# EAGLE board nanopi-black2-shield (EAGLE 9.6.1)

Size 100 x 80 mm. Coordinates in mm from the lower left corner, seen from the top.
Outline: 0,0 100,0 100,80 0,80 0,0
Copper layers (1*16): Top 0.035mm / dielectric 1.5mm / Bottom 0.035mm
Design rules "default": minimum track width 6mil, minimum drill 0.35mm, track to track 6mil, track to pad 6mil, pad to pad 6mil, via to via 6mil, smd to smd 6mil, copper to edge 40mil, drill to drill 6mil, minimum pad ring 10mil, minimum via ring 8mil, stop-mask expansion 4mil, vias tented up to drill 0mil, thermal gap 10mil
Net classes: 1 Power: width 0.305 mm

## Footprints (pad centres in the part's own frame; a part is rotated, then mirrored left to right if it is on the bottom)
0603 = smd 1.1 x 1: 1 -0.85,0; 2 0.85,0
SOT223 = smd 1.219 x 2.235: 1 -2.311,-3.099; 2 0,-3.099; 3 2.311,-3.099 | smd 3.6 x 2.2: 4 0,3.099
61301021121 = drill 1.1: 1 -5.08,-1.27; 2 -5.08,1.27; 3 -2.54,-1.27; 4 -2.54,1.27; 5 0,-1.27; 6 0,1.27; 7 2.54,-1.27; 8 2.54,1.27; 9 5.08,-1.27; 10 5.08,1.27
61300621121 = drill 1.1: 1 -2.54,-1.27; 2 -2.54,1.27; 3 0,-1.27; 4 0,1.27; 5 2.54,-1.27; 6 2.54,1.27
61300611021 = drill 1.1: 1 6.35,2.77; 2 3.81,2.77; 3 1.27,2.77; 4 -1.27,2.77; 5 -3.81,2.77; 6 -6.35,2.77
61300411821 = drill 1.02: 1 -3.81,0; 2 -1.27,0; 3 1.27,0; 4 3.81,0
61300211821 = drill 1.02: 1 -1.27,0; 2 1.27,0

## Placement (x,y rotation side)
C1  1.0uF  [0603]  2.54,-10.16 0 top  (outside the outline)
C2  1.0uF  [0603]  2.54,-2.54 0 top
IC1  LM1117MP-3.3  [SOT223]  34.29,41.91 0 top
J1  [61301021121]  53.34,57.15 0 top
J2  [61300621121]  26.67,64.77 0 top
J4  [61300611021]  50.8,16.51 0 top
J5  [61300411821]  74.93,34.29 0 top
J6  [61300211821]  13.97,35.56 0 top

## Library data of the parts
C1 C2 = SparkFun-Capacitors; PROD_ID: CAP-00868
IC1 = lm1117; MF: Texas Instruments; MPN: LM1117MP-3.3; OC_FARNELL: 9778195; OC_NEWARK: 28X3416
J1 = 61300211821_Eagle_WR-PHD_rev19a; DATASHEET-URL: https://katalog.we-online.com/em/datasheet/61301021121.pdf; GENDER: Pin Header; IR: 3A; MATES: WR-PHD 2.54mm Angled DualSocket Header/Dual Socket Header/Dual Socket Header Bottom Entry/Dual Socket Header Bottom Entry Large/SMT Dual Socket Header/SMT Dual Socket Header Bottom Entry; PACKAGING: Bag; PART-NUMBER: 61301021121; PINS: 10; ROWS: Dual; TYPE: Board Stacker
J2 = 61300211821_Eagle_WR-PHD_rev19a; DATASHEET-URL: https://katalog.we-online.com/em/datasheet/61300621121.pdf; GENDER: Pin Header; IR: 3A; MATES: WR-PHD 2.54mm Angled DualSocket Header/Dual Socket Header/Dual Socket Header Bottom Entry/Dual Socket Header Bottom Entry Large/SMT Dual Socket Header/SMT Dual Socket Header Bottom Entry; PACKAGING: Bag; PART-NUMBER: 61300621121; PINS: 6; ROWS: Dual; TYPE: Board Stacker
J4 = 61300411121_Eagle_WR-PHD_rev19a; DATASHEET-URL: https://katalog.we-online.com/em/datasheet/61300611021.pdf; GENDER: Pin Header; IR: 3A; MATES: WR-PHD 2.5mm Angled Socket Header/SMT Socket Header/Socket Header/Soket Header Bottom Entry; PACKAGING: Bag; PART-NUMBER: 61300611021; PINS: 6; ROWS: Single; TYPE: Angled
J5 = 61300411121_Eagle_WR-PHD_rev19a; DATASHEET-URL: https://katalog.we-online.com/em/datasheet/61300411821.pdf; GENDER: Socket Header; IR: 3A; MATES: WR-PHD 2.54mm SMT Pin Header/THT Angled Pin Header/THT Pin Header; PACKAGING: Tray; PART-NUMBER: 61300411821; PINS: 4; ROWS: Single; TYPE: Straight
J6 = 61300621821_Eagle_WR-PHD_rev19a; DATASHEET-URL: https://katalog.we-online.com/em/datasheet/61300211821.pdf; GENDER: Socket Header; IR: 3A; MATES: WR-PHD 2.54mm SMT Pin Header/THT Angled Pin Header/THT Pin Header; PACKAGING: Tray; PART-NUMBER: 61300211821; PINS: 2; ROWS: Single; TYPE: Straight

## Nets
3,3V: C2.1 IC1.2 IC1.4
3.3V [Power]: J5.3
5V-1: C1.1 IC1.3 J1.2
5V-2: J1.4
GND: C1.2 C2.2 IC1.1 J1.6 J1.9 J4.1 J5.2
GPIOA0: J1.1
GPIOA2: J1.7
I2C_SCL0: J1.5 J5.1
I2C_SDA0: J1.3 J5.4
RX: J4.4 J6.2
TX: J4.5 J6.1
UART1_RX: J1.10
UART1_TX: J1.8

## Tracks (layer width: path | path; a pad name or v marks a point on that pad's centre or on a via)
3,3V  (2 unrouted)
5V-1  (2 unrouted)
GND  (6 unrouted)
I2C_SCL0  (1 unrouted)
I2C_SDA0  (1 unrouted)
RX  (1 unrouted)
TX  (1 unrouted)